# Altium PCB Button3x4S-4_Pcb.PcbDoc
Units mil, origin at the board's own origin, x right, y up, seen from the top; angles counter-clockwise.
Board outline 400 x 600 mil, 2 copper layers (Top Layer, Bottom Layer); 20 components, 6 nets, 36 pads, 5 vias.
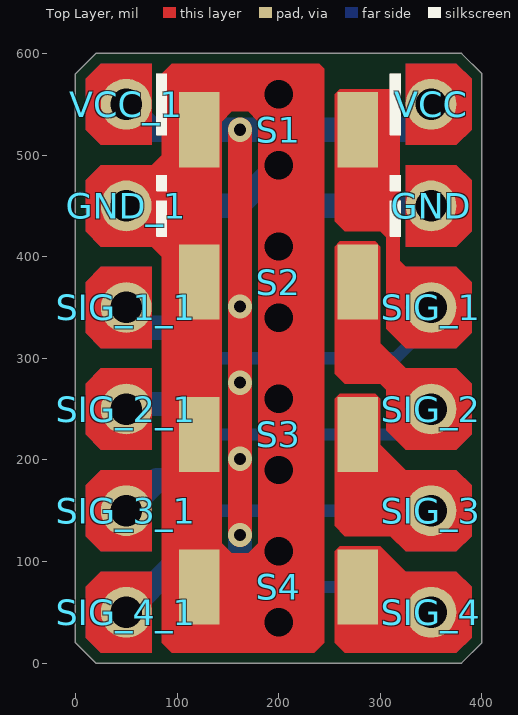
[diagram p0: Top Layer view]
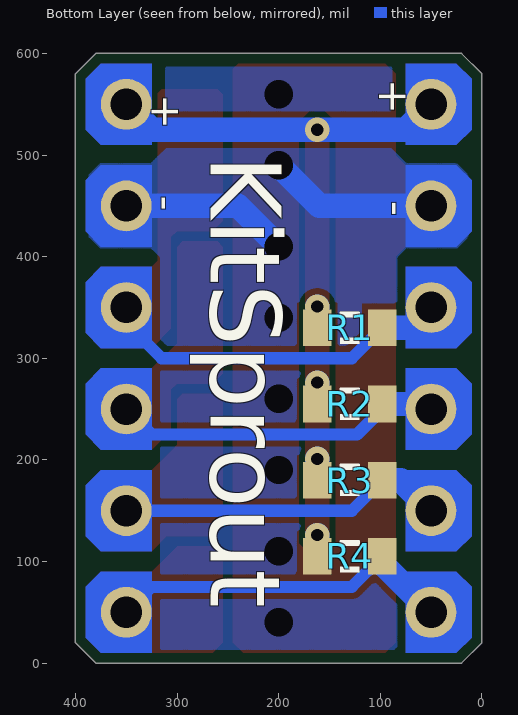
[diagram p1: Bottom Layer view, seen from below]
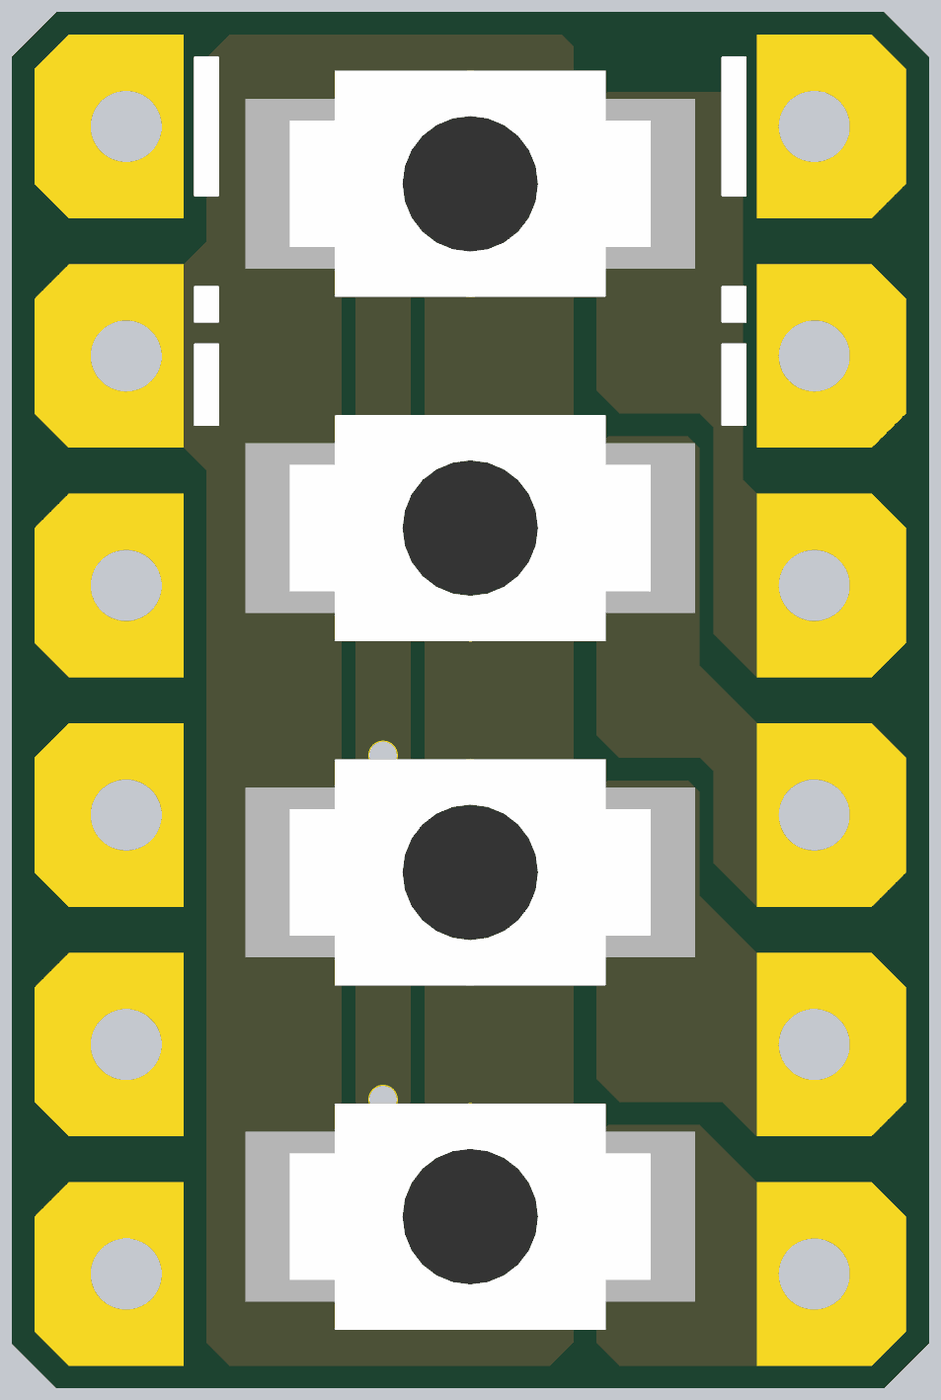
[diagram p2: 3D render of the assembled board from above, using the file's embedded part models]
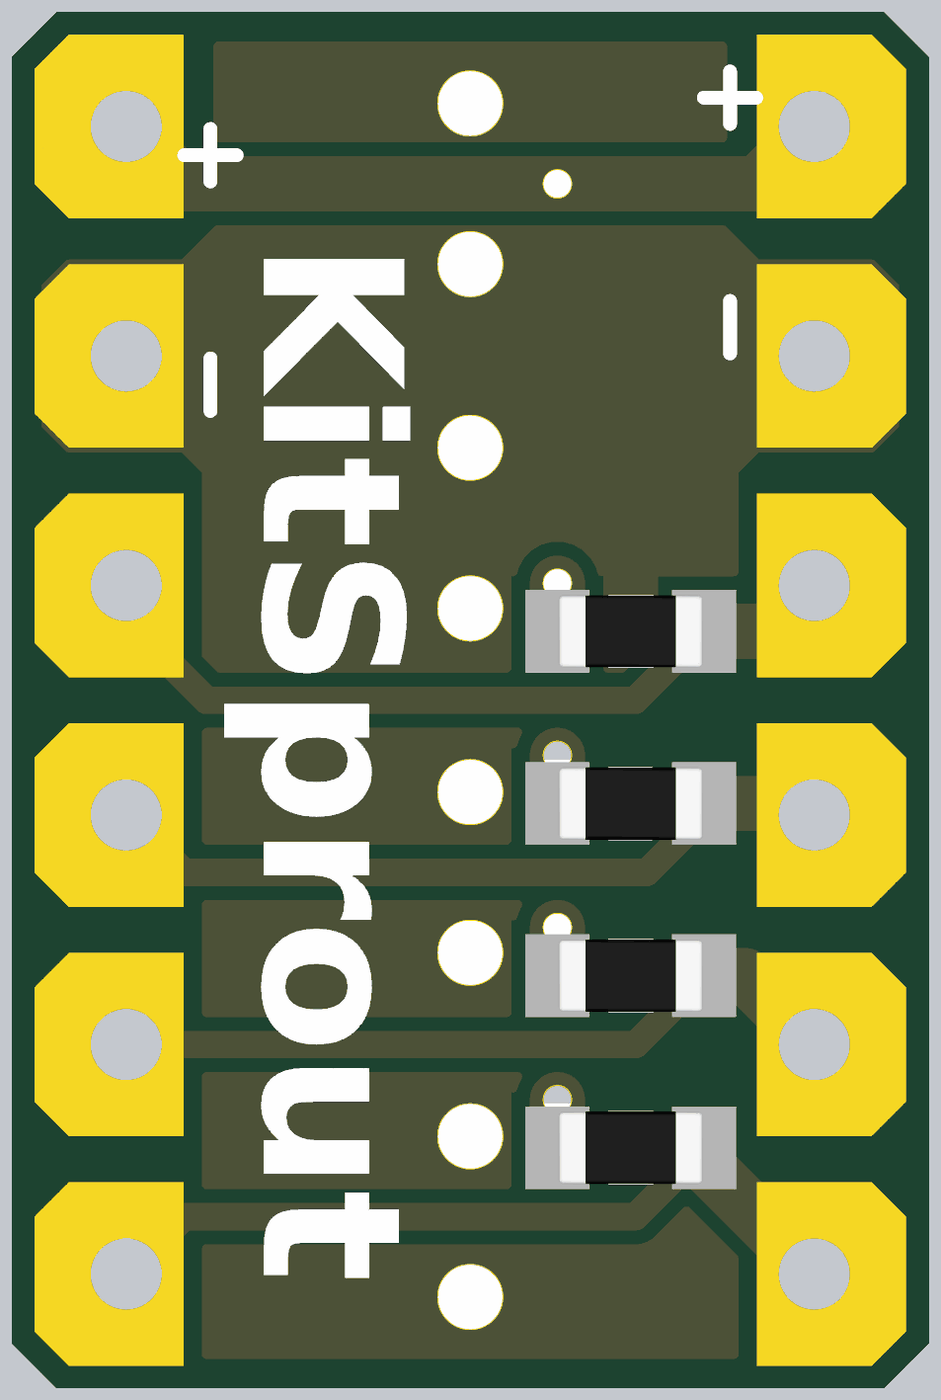
[diagram p3: 3D render of the assembled board from below, using the file's embedded part models]

## Layer stack, top to bottom
Top Solder: solder mask 0.4, Solder Resist, Dk 3.5
Top Layer: signal copper 1.4
Dielectric1: dielectric 12.6, FR-4, Dk 4.8
Bottom Layer: signal copper 1.4
Bottom Solder: solder mask 0.4, Solder Resist, Dk 3.5

## Board outline
0,20 20,0 380,0 400,20 400,580 380,600 20,600 0,580

## Design rules (kind name [scope] priority, off if disabled: settings)
Clearance ClearancePolygon [InPolygon] p1: gap=6
Clearance [All] p2: gap=6
ComponentClearance [All] p1: gap=0 collisioncheckmode=3 verticalgap=0 showdistances=FALSE
Height [All] p1: minheight=0 maxheight=5000 prefheight=500
HoleToHoleClearance [All] p1: gap=6 allowstackedmicrovias=TRUE
MinimumSolderMaskSliver [All] p1: minsoldermaskwidth=6
PlaneConnect [All] p1: planeconnectstyle=Direct reliefexpansion=20 reliefentries=4 reliefconductorwidth=20 reliefairgap=10
PolygonConnect [All] p1: connectstyle=Direct reliefconductorwidth=20 reliefentries=4 polygonreliefangle="90 Angle" airgapwidth=10
RoutingVias [All] p1: holewidth=12 width=20 viastyle="Through Hole" minholewidth=12 minwidth=20 maxholewidth=100 maxwidth=200
SilkToSilkClearance [All] p1: silktosilkclearance=0
SilkToSolderMaskClearance SilkscreenOverComponentPads [IsPad] p1: minsilkscreentomaskgap=1 clearancetoexposedcopper=TRUE
SolderMaskExpansion [All] p1: expansion=0
Width [All] p1: maxlimit=30 minlimit=6 preferedwidth=10
22 further rules are at their usual default settings.

## Classes and differential pairs
component class Button3x4S-4_Sch: GND R1 R2 R3 R4 S1 S2 S3 S4 SIG_1 SIG_2 SIG_3 SIG_4 VCC

## Components (designator, comment, footprint, x,y, rotation, side; value= is the part's Value field where it differs from the comment)
GND "HDR-PAD_2.54" HDR-PAD_2.54 350,450 r0 top
GND_1 "HDR-PAD_2.54" HDR-PAD_2.54 50,450 r0 top (schematic designator GND)
R1 "Res_0603" RES_0603 130,330 r0 bottom
R2 "Res_0603" RES_0603 130,255 r0 bottom
R3 "Res_0603" RES_0603 130,180 r0 bottom
R4 "Res_0603" RES_0603 130,105 r0 bottom
S1 "ButtonTACT_3x4x2_180" ButtonTACT_3x4x2_180H 200,525 r0 top locked
S2 "ButtonTACT_3x4x2_180" ButtonTACT_3x4x2_180H 200,375 r0 top locked
S3 "ButtonTACT_3x4x2_180" ButtonTACT_3x4x2_180H 200,225 r0 top locked
S4 "ButtonTACT_3x4x2_180" ButtonTACT_3x4x2_180H 200,75 r0 top locked
SIG_1 "HDR-PAD_2.54" HDR-PAD_2.54 350,350 r90 top
SIG_1_1 "HDR-PAD_2.54" HDR-PAD_2.54 50,350 r90 top (schematic designator SIG_1)
SIG_2 "HDR-PAD_2.54" HDR-PAD_2.54 350,250 r90 top
SIG_2_1 "HDR-PAD_2.54" HDR-PAD_2.54 50,250 r90 top (schematic designator SIG_2)
SIG_3 "HDR-PAD_2.54" HDR-PAD_2.54 350,150 r90 top
SIG_3_1 "HDR-PAD_2.54" HDR-PAD_2.54 50,150 r90 top (schematic designator SIG_3)
SIG_4 "HDR-PAD_2.54" HDR-PAD_2.54 350,50 r90 top
SIG_4_1 "HDR-PAD_2.54" HDR-PAD_2.54 50,50 r90 top (schematic designator SIG_4)
VCC "HDR-PAD_2.54" HDR-PAD_2.54 350,550 r0 top
VCC_1 "HDR-PAD_2.54" HDR-PAD_2.54 50,550 r0 top (schematic designator VCC)

## Footprints (in the part's own frame and the unit in brackets; to place one, negate y for a bottom-side part, rotate by r counter-clockwise, add the part's x,y. Pads: shape width x height; smd on the part's side, far side on the other; paste and mask are expansions set on the pad)
ButtonTACT_3x4x2_180H [mil]
  round 0 hole 28: 0(0,-35) 0(0,35)
  rect 40x74 smd: 1(-78,0) 2(78,0)
  body extent -79,-49 79,49, height 63
HDR-PAD_2.54 [mil]
  round 50 hole 31: 1(0,0)
RES_0603 [mil]
  rect 28x36 smd: 1(-32,0) 2(32,0)
  silkscreen extent -10,-16 10,16, body extent -31,-16 32,16, height 20

## Part data
GND GND_1 SIG_1 SIG_1_1 SIG_2 SIG_2_1 SIG_3 SIG_3_1 SIG_4 SIG_4_1 VCC VCC_1: "Header"
R1 R2 R3 R4: "Resistor"
S1 S2 S3 S4: "Button"

## Via types
v1: diameter 24, hole 12, Top Layer to Bottom Layer, 5 vias

## Nets (pads, with @x,y where several pads share a name; then routed paths per layer and width w, separated by ;. In a path a pad name is that pad's centre, name@x,y a point inside that pad or via, vN(x,y) a via of type N, cw(c..) or ccw(c..) an arc to the next point about the centre after c; other vN are vias at no path point)
GND: GND.1 GND_1.1 S1.0 S1.1 S2.0 S2.1 S3.0 S3.1 S4.0 S4.1 | length 1395.6
  Top Layer w24: S1.1 S4.1 157,40 200,40 200,110 200,190 200,260 200,340 200,410 200,560
  Bottom Layer w24: GND_1.1 160,450 200,490 ; 200,410 240,450 GND.1
SIG_1: R1.1 S1.2 SIG_1.1 SIG_1_1.1 | length 350.2
  Bottom Layer w12: R1.1 128,300 315,300 350,335 SIG_1.1
  Bottom Layer w24: SIG_1_1.1 70,330 R1.1
SIG_2: R2.1 S2.2 SIG_2.1 SIG_2_1.1 | length 329.9
  Bottom Layer w12: R2.1@93,255 123,225 325,225 SIG_2.1
  Bottom Layer w24: SIG_2_1.1 55,255 93,255 R2.1
SIG_3: R3.1 S3.2 SIG_3.1 SIG_3_1.1 | length 324.9
  Bottom Layer w12: R3.1 128,150 SIG_3.1
  Bottom Layer w24: SIG_3_1.1 80,180 R3.1
SIG_4: R4.1 S4.2 SIG_4.1 SIG_4_1.1 | length 349.7
  Bottom Layer w12: R4.1 128,75 325,75 SIG_4.1
  Bottom Layer w24: SIG_4_1.1 98,98 R4.1
VCC: R1.2 R2.2 R3.2 R4.2 VCC.1 VCC_1.1 | length 803.7
  Top Layer w24: v1(162,126) v1(162,525)
  Bottom Layer w24: VCC_1.1 75,525 325,525 VCC.1 ; R4.2 v1(162,126) ; R3.2 v1(162,201) ; R2.2 v1(162,276) ; R1.2 v1(162,351)

## Polygon pours and split planes (outlines as drawn)
GND on Bottom Layer "Mechanical 1-No Net" (hatched 90Degree grid 2 track 4, remove dead copper, pour order 2): 25,585 15,575 15,565 15,25 25,15 155,15 375,15 385,25 385,45 385,575 375,585

## Other copper
Top Layer:
  region net SIG_4: 75,90 25,90 10,75 10,25 25,10 75,10
  region net SIG_3: 75,190 25,190 10,175 10,125 25,110 75,110
  region net SIG_2: 75,290 25,290 10,275 10,225 25,210 75,210
  region net SIG_1: 75,390 25,390 10,375 10,325 25,310 75,310
  region net GND: 325,410 375,410 390,425 390,475 375,490 325,490
  region net VCC: 325,510 375,510 390,525 390,575 375,590 325,590
  region net VCC: 75,590 25,590 10,575 10,525 25,510 75,510
  region net GND: 25,490 75,490 85,500 85,580 95,590 240,590 245,585 245,190 180,190 180,533 170,543 154,543 144,533 144,118 154,108 170,108 180,118 180,190 245,190 245,20 235,10 95,10 85,20 85,400 75,410 25,410 10,425 10,475
  region net SIG_4: 260,115 255,110 255,20 265,10 375,10 390,25 390,75 375,90 325,90 300,115
  region net SIG_3: 300,260 295,265 260,265 255,260 255,135 265,125 310,125 325,110 375,110 390,125 390,175 375,190 325,190 300,215
  region net SIG_2: 295,415 300,410 300,315 325,290 375,290 390,275 390,225 375,210 325,210 306,229 306,269 300,275 265,275 255,285 255,410 260,415
  region net SIG_1: 260,565 255,560 255,435 265,425 300,425 306,419 306,329 325,310 375,310 390,325 390,375 375,390 325,390 319,396 319,561 315,565
Bottom Layer:
  region net VCC: 75,590 25,590 10,575 10,525 25,510 75,510
  region net GND: 75,490 25,490 10,475 10,425 25,410 75,410
  region net SIG_1: 75,390 25,390 10,375 10,325 25,310 75,310
  region net SIG_2: 75,290 25,290 10,275 10,225 25,210 75,210
  region net SIG_3: 75,190 25,190 10,175 10,125 25,110 75,110
  region net SIG_4: 75,90 25,90 10,75 10,25 25,10 75,10
  region net SIG_4: 325,10 375,10 390,25 390,75 375,90 325,90
  region net SIG_3: 325,110 375,110 390,125 390,175 375,190 325,190
  region net SIG_2: 325,210 375,210 390,225 390,275 375,290 325,290
  region net SIG_1: 325,310 375,310 390,325 390,375 375,390 325,390
  region net GND: 325,410 375,410 390,425 390,475 375,490 325,490
  region net VCC: 325,510 375,510 390,525 390,575 375,590 325,590
  pour cut-out: 390,25 375,10 315,10 315,400 325,410 375,410 390,425
  pour cut-out: 310,590 375,590 390,575 390,475 375.07,490 325,490 310,505
  pour cut-out: 25,590 90,590 90,505 75,490 25,490 10,475 10,575
  pour cut-out: 85,10 25,10 10,25 10,425 24.93,410 75,410 85,400

## Silkscreen, mask and mechanical layers (free items; w line width, h text height)
Top Overlay:
  region: 310,480 320,480 320,465 310,465
  region: 310,455 320,455 320,420 310,420
  region: 320,520 310,520 310,580 320,580
  region: 80,480 90,480 90,465 80,465
  region: 80,455 90,455 90,420 80,420
  region: 80,580 90,580 90,520 80,520
  lines w1: 80,420 90,420 90,455 80,455 80,420 ; 80,465 80,480 90,480 90,465 80,465 ; 80,520 80,580 90,580 90,520 80,520 ; 310,420 320,420 320,455 310,455 310,420 ; 310,465 310,480 320,480 320,465 310,465 ; 310,520 310,580 320,580 320,520 310,520
Bottom Overlay:
  text "+" at 325,560 h30 r90
  text "+" at 75,540 h30 r270
  text "KitSprout" at 290,500 h120 r90
  text "-" at 325,460 h30 r90
  text "-" at 75,440 h30 r270
Top Solder:
  region: 75,590 25,590 10,575 10,525 25,510 75,510
  region: 325,410 375,410 390,425 390,475 375,490 325,490
  region: 325,510 375,510 390,525 390,575 375,590 325,590
  region: 75,490 25,490 10,475 10,425 25,410 75,410
  region: 325,310 375,310 390,325 390,375 375,390 325,390
  region: 325,210 375,210 390,225 390,275 375,290 325,290
  region: 325,110 375,110 390,125 390,175 375,190 325,190
  region: 325,10 375,10 390,25 390,75 375,90 325,90
  region: 75,390 25,390 10,375 10,325 25,310 75,310
  region: 75,290 25,290 10,275 10,225 25,210 75,210
  region: 75,190 25,190 10,175 10,125 25,110 75,110
  region: 75,90 25,90 10,75 10,25 25,10 75,10
Bottom Solder:
  region: 75,590 25,590 10,575 10,525 25,510 75,510
  region: 325,410 375,410 390,425 390,475 375,490 325,490
  region: 325,510 375,510 390,525 390,575 375,590 325,590
  region: 75,490 25,490 10,475 10,425 25,410 75,410
  region: 325,310 375,310 390,325 390,375 375,390 325,390
  region: 325,210 375,210 390,225 390,275 375,290 325,290
  region: 325,110 375,110 390,125 390,175 375,190 325,190
  region: 325,10 375,10 390,25 390,75 375,90 325,90
  region: 75,390 25,390 10,375 10,325 25,310 75,310
  region: 75,290 25,290 10,275 10,225 25,210 75,210
  region: 75,190 25,190 10,175 10,125 25,110 75,110
  region: 75,90 25,90 10,75 10,25 25,10 75,10
Mechanical 1:
  the board outline again, w2

## Dimensions
380,600 to 380,0 on Mechanical 13
0,580 to 400,580 on Mechanical 13